# Altium PCB System Control.PcbDoc (part 3 of 7)
Units mil, origin at the board's own origin, x right, y up, seen from the top; angles counter-clockwise.
Board outline 5312.56 x 5103.22 mil, 12 copper layers (Top, GND 2, Signal 3, Signal 4, 3.3V 5, Signal 6, Signal 7, 2.5V 8, Signal 9, Signal 10, GND 11, Bottom); 503 components, 484 nets, 2219 pads, 1158 vias.
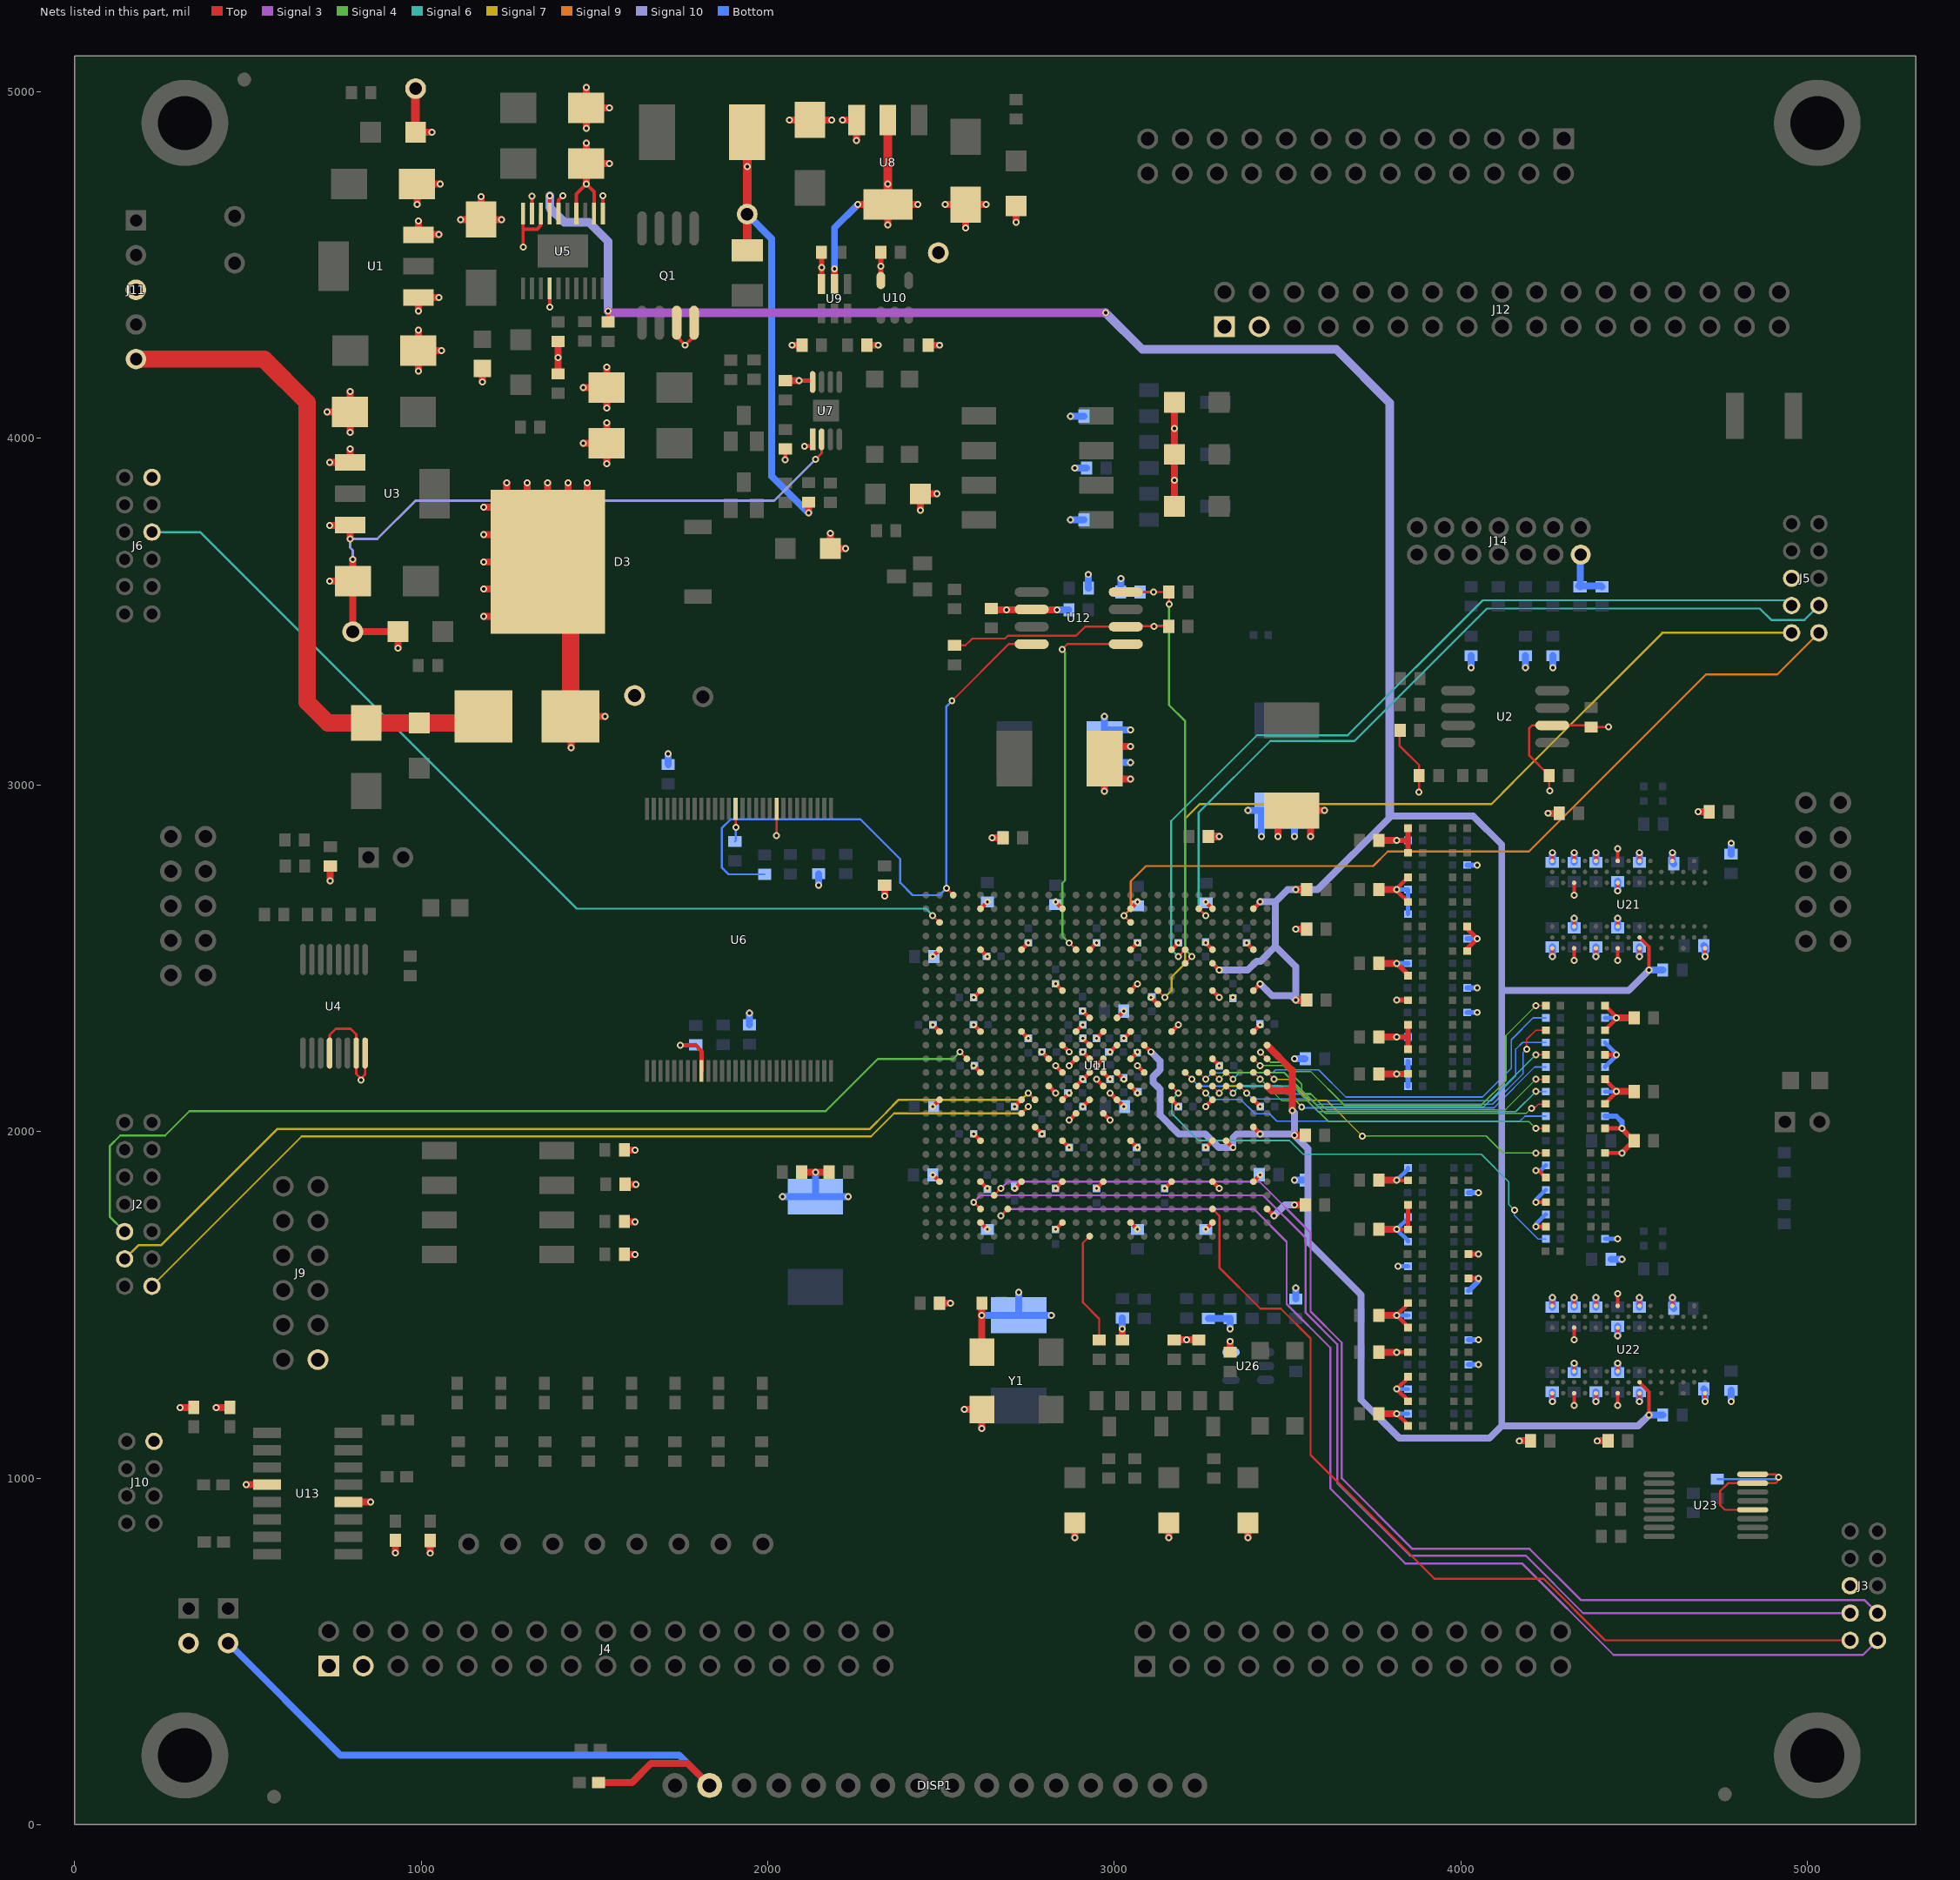
[diagram p13: the nets of this part, all layers, seen from the top]

## Part data
C1 C2 C3 C4 C8 C9 C11 C12 C22 C23 C37 C38: library part CAP_1, "SMD Tantalum Capacitors 10uF 25V 20% L ESR"
C5 C10 C16 C18 C19 C20 C21 C31 C32 C34 C42 C44 C47 C48 C51 C52 C53 C57 C64 C65 C69 C79 C100 C170 C171 C183 C205 C208 C209 C211 C213 C215 C226 C227 C231 C232 C234 C235 C236 C237 C238 C246 C248 C252: library part "CAP NP_1", "CAP CER .10UF 50V X7R 0603"
C6 C13 C14 C55 C56 C63 C80 C81 C253: library part "CAP NP_1", "CAP 1UF 25V CERAMIC 0603 X5S"
C7: library part "CAP NP_1", "CAP .1UF 50V CERM CHIP 1206 X7R"
C15 C36 C43 C45 C46 C49 C50 C59 C104 C112 C115 C163 C175 C247 C251: library part "CAP NP_1", "CAP CER 4.7UF 10V Y5V 0603"
C17: library part "CAP NP_1", "CAP .033UF 50V CERAMIC X7R 0603"
C25: library part CAP_1, "CAPACITOR TANT 100UF 25V 20% SMD"
C35 C54 C102 C105 C124 C172: library part CAP_1, "CAP TANT LOESR 470UF 10V 10% SMD"
C58 C60 C61 C62 C66 C67 C68 C76 C77 C78 C85 C86 C87 C88 C180 C182 C185 C187 C210 C212 C214 C216 C225 C228 C229 C230 C233 C240 C241 C242 C243 C244 C245: library part "C10nF 50V X7R 0603", "CAP 10000PF 50V CERM X7R 0603"
C106 C108 C110 C116 C123 C134 C146 C153 C155 C156 C168 C169 C179 C181 C186: library part "CAP NP_1", "CAP CER 1.0UF 10V X5R 10% 0402"
C107 C109 C113 C117 C118 C119 C120 C121 C122 C125 C126 C127 C129 C130 C131 C132 C133 C135 C136 C137 C138 C139 C140 C141 C142 C143 C145 C147 C148 C149 C150 C151 C152 C154 C157 C158 C159 C160 C161 C164 C165 C167 C173 C174 C178: library part "C10nF 50V X7R 0603", "CAP .01UF 25V CERAMIC X7R 0402"
D1 D2 D4 D5 D8 D9 D12 D13 D14 D15 D16: library part LED, "LED 635NM RED WTR CLR 1206 SMD"
D3: "On Semi Switchmode Power Rectifier"
D6: library part LED, "LED INGAN/SIC U-BLUE CLR 1206SMD"
DISP1: "CONN SOCKET STRIP LOPRO 16 PIN"
F1 F2 F4: library part "TEST POINT"
F3: library part "FUSE THERMAL", "FUSEBLOCK W/3A FUSE SMD FAST"
J1 J8: library part "CONNECTOR DB9_1", "CONN HEADER 10 POS STRGHT GOLD"
J2: library part "14 pin Hirose", "CONN HEADER 14POS 2MM PCB TIN"
J3 J5: library part HEADER_2X5_1, "CONN HEADER 10POS 2MM PCB TIN"
J4 J12: library part "Header 17X2", "CONN HEADER LOPRO STR .100 34POS"
J6: library part HEADER_2X6_1, "CONN HEADER 12POS 2MM PCB TIN"
J7 J13: library part "Header 13X2", "CONN HEADER LOPRO STR .100 26POS"
J9: "CONN HEADER 12POS .100\" STR TIN"
J10: "CONN HEADER 8POS 2MM PCB TIN"
J11: library part "Header 5", "CONN HEADER 5POS .100 VERT GOLD"
J14: "CONN HEADER 14POS 2MM VERT GOLD"
L1: library part INDUCTOR, "INDUCTOR POWER 2.2UH 3.25A SMD"
L2: library part "TDK Inductor", "INDUCTOR WW PWR 47UH 260MA 10%"
LD0 LD1 LD2 LD3 LD4 LD5 LD6 LD7: "LED 565NM GRN DIFF 0603 SMD"
MT1 MT2 MT3 MT4: library part CON1_0
Q1: "MOSFET N-CH DUAL 30V 3.5A 8SOIC"
Q2 Q3 Q4 Q5 Q6 Q7 Q9 Q10 Q11: library part NDS355N/SOT, "MOSFET N-CH 30V 1.6A SOT-23"
R1: library part RESISTOR_0_Dup1, "RES 100K OHM 1/10W .1% 0805 SMD"
R2 R3 R4 R14 R19 R23 R33 R38 R39 R42 R174 R175 R176: library part "R1K 5% 0603", "RES 1.0K OHM 1/10W 5% 0603 SMD"
R5: library part RESISTOR_0_Dup1, "RES 10K OHM 1/10W 5% 0603 SMD"
R6: library part RESISTOR_0_Dup1, "RES 5.11K OHM 1/10W 1% 0603 SMD"
R7: library part RESISTOR_0_Dup1, "RES 750 OHM 1/10W 5% 0603 SMD"
R9 R27 R30 R180 R182 R294: library part "R0 5% 0603", "RES ZERO OHM 1/10W 5% 0603 SMD"
R10 R129: library part R, "RES 100 OHM 1/10W 1% 0805 SMD"
R11 R12 R13 R15 R17 R21 R22 R24 R26 R29 R31 R37 R40 R41 R47 R48 R49 R50 R146 R147 R150 R152 R153 R154 R155 R156 R159 R163 R165 R183 R275: library part "R10K 5% 0603", "RES 10K OHM 1/10W 5% 0603 SMD"
R16 R158 R167 R170 R172 R177 R178: library part "R4.7K 5% 0603", "RES 4.7K OHM 1/10W 5% 0603 SMD"
R18 R28 R34 R36 R43 R44 R45 R46: "RES 270 OHM 1/10W 5% 0603 SMD"
R20: library part "R1K 5% 0603", "RES 6.80K OHM 1/10W 1% 0603 SMD"
R25: library part "R1K 5% 0603", "RES 30.9K OHM 1/10W 1% 0603 SMD"
R32 R35: library part "R10K 5% 0603", "RES 33 OHM 1/10W 5% 0603 SMD"
R51 R52 R53 R54 R56 R58 R59 R60 R61 R62 R63 R64 R66 R68 R69 R70 R71 R72 R80 R81 R90 R92 R108 R110 R111 R117 R118 R119 R120 R121 R122 R123 R168 R192 R193 R195 R196 R198 R201 R202 R203 R205 R206 R207 R208 R210 R213 R222 R225 R228 R229 R232 R236 R239 R240 R266 R267 R268 R273 R274 R276 R277 R279 R282: library part "R1K 5% 0603", "RES 60.4 OHM 1/16W 1% 0402 SMD"
R55 R57 R65 R67 R76 R77 R78 R79 R82 R83 R84 R85 R86 R87 R88 R89 R91 R93 R94 R95 R96 R97 R164 R194 R197 R199 R200 R204 R209 R211 R212 R221 R223 R224 R226 R227 R230 R231 R233 R234 R235 R237 R238 R241 R242: library part "R1K 5% 0603", "RES 24.0 OHM 1/16W 1% 0402 SMD"
R73 R74 R99 R100: "RES 1.0K OHM 1/10W 5% 0603 SMD"
R75 R98 R101 R116: "RES 120 OHM 1/10W 1% 0603 SMD"
R102 R103 R104 R105 R106 R107 R109 R112 R113 R114 R115 R260 R261 R262 R263 R264 R265 R269 R278 R280 R281 R284 R286 R289 R290: library part "R1K 5% 0603", "RES 33.0 OHM 1/16W 1% 0402 SMD"
R157 R160 R166 R171: library part "R1K 5% 0603", "RES 49.9 OHM 1/10W 1% 0603 SMD"
R285 R287: library part RESISTOR_0, "RES 100 OHM 1/16W .5% 0603 SMD"
S1 S3: "SWITCH KEY 4MM SQ SMD GULL WING"
S2 S4: "SWITCH DIP 4POS TOP SLIDE SMT"
TP1 TP2: library part "TEST POINT", "TEST POINT PC MINI .040\"D RED"
TP3 TP4 TP6 TP7 TP8 TP9 TP10 TP11 TP12 TP13 TP14 TP15 TP16: "TEST POINT PC MINI .040\"D RED"
TP5: "TEST POINT PC MINI .040\"D BLACK"
U1: library part LT1963A, "IC REG LDO LN 1.5A 3.3V SOT-223"
U2 U12: "Flash Mem Serial-SPI 2.7V to 3.6V 16M-Bit 6ns 8-Pin SOIC"
U3: library part LT1963A, "IC REG LDO LN 1.5A 2.5V SOT223-3"
U4 U23: library part MAX3221/SO_0, "IC DRVR/RCVR RS-232 1-CH 16TSSOP"
U5: "Controllers - DC/DC DDR2 SWITCHER AND LDO"
U6: "Flash Mem Parallel 2.7V to 3.6V 128M-Bit 16M x 8/8M x 16 75ns 56-Pin TSOP"
U7: "IC 3.3/2.5V/ADJ TPL MONIT 8-MSOP"
U8: "IC REG LDO 1.0A POS SOT223"
U9: "IC VOLT SUPERVISOR 1.2V SOT23-6"
U10: "IC 4.55V SUPPLY MONITOR SOT23-5"
U11: "IC, SPARTAN-3A, FPGA, 1400K, 656FBGA"
U13: "IC, OPTOCOUPLER, QUAD, BIDIR, 16-SOIC"
U21 U22: library part "MT47H32M16BN-3:D TR", "IC DDR2 SDRAM 256MB 84-FBGA"
U26: "Single 2-input AND Gate"
W1 W2 W3 W4: "CONN HEADER 2POS .100\" STR TIN"
Y1: library part FXO-HC73, "OSC 125.0000 MHZ 3.3V HCMOS SMT"

## Via types
v1: diameter 20, hole 10, Top to Bottom, tented top, 1040 vias
v2: diameter 20, hole 8, Top to Bottom, tented top, 118 vias

## Nets (pads, with @x,y where several pads share a name; then routed paths per layer and width w, separated by ;. In a path a pad name is that pad's centre, name@x,y a point inside that pad or via, vN(x,y) a via of type N, cw(c..) or ccw(c..) an arc to the next point about the centre after c; other vN are vias at no path point)
3V3_CAM: J10.1 R73.2 R74.2 U13.4 | length 140
  Top w20: v1(304,1204) R73.2@344,1204 ; v1(408,1204) R74.2@448,1204 ; v1(495,981) U13.4@555,981
+0.9V: C11.P C12.P C57.1 C58.1 C61.1 C62.1 C64.1 C65.1 C66.1 C67.1 C68.1 C69.1 C85.1 C86.1 C87.1 C229.1 R51.2 R52.2 R53.2 R54.2 R56.2 R58.2 R59.2 R60.2 R61.2 R62.2 R63.2 R64.2 R66.2 R68.2 R69.2 R70.2 R71.2 R72.2 R80.2 R81.2 R90.2 R92.2 R108.2 R110.2 R111.2 R117.2 R118.2 R119.2 R120.2 R121.2 R122.2 R123.2 R168.2 R192.2 R193.2 R195.2 R196.2 R198.2 R201.2 R202.2 R203.2 R205.2 R206.2 R207.2 R208.2 R210.2 R213.2 R222.2 R225.2 R228.2 R229.2 R232.2 R236.2 R239.2 R240.2 R266.2 R267.2 R268.2 R273.2 R274.2 R276.2 R277.2 R279.2 R282.2 U5.2 U5.4 | length 3947.3
  Top w10: U5.4@1447.39,4648.82 1447.39,4704.92 v1(1475.93,4733.46) 1498.57,4710.83 U5.2@1498.57,4648.82
  Top w12.01: v1(3814.52,1186.22) 3847.31,1153.43 R72.2@3847.32,1150.79 ; v1(3814.52,1363.39) R69.2@3847.32,1363.39 ; v1(3814.52,1717.72) R64.2@3847.32,1717.72 R63.2@3847.32,1788.58 ; v1(3814.52,1859.45) R62.2@3847.32,1859.45 ; R71.2@3847.32,1221.65 3847.31,1224.29 v1(3814.52,1257.09) 3847.31,1289.88 R70.2@3847.32,1292.52 ; R68.2@3847.32,1434.25 3847.31,1436.89 v1(3814.52,1469.68) 3847.31,1502.48 R66.2@3847.32,1505.12 ; R53.2@3847.32,2662.6 3814.52,2695.39 v1(3814.52,2698.03) 3814.52,2700.67 R54.2@3847.32,2733.46 ; v1(4216.09,1725.59) R111.2@4244.95,1725.59 ; v1(4216.09,1796.46) R110.2@4244.95,1796.46 ; v1(4216.09,1887.01) 4225.26,1887.01 R108.2@4244.95,1867.32 ; R123.2@4415.57,1938.19 v1(4464.12,1938.19) ; R122.2@4415.57,2009.06 v1(4464.12,2009.06) ; R120.2@4415.57,2079.92 4444.44,2108.78 4444.44,2111.42 v1(4448.37,2115.35) 4444.44,2119.29 4444.44,2121.93 R121.2@4415.57,2150.79 ; R119.2@4415.57,2221.65 v1(4448.37,2221.65) ; R117.2@4415.57,2292.52 4444.44,2321.38 4444.44,2324.02 v1(4448.37,2327.95) 4444.44,2331.89 4444.44,2334.53 R118.2@4415.57,2363.39
  Top w15: v1(3814.52,2166.54) R60.2@3847.32,2166.53 ; v1(3814.52,2272.83) 3847.31,2272.83 ; v1(3814.52,2379.13) R56.2@3847.32,2379.13 ; v1(3814.52,2485.43) 3847.31,2452.64 R58.2@3847.32,2450 ; v1(3814.52,2839.76) 3847.31,2839.76 ; R61.2@3847.32,2237.4 3847.31,2272.83 ; R59.2@3847.32,2308.27 3847.31,2272.83 ; R52.2@3847.32,2804.33 3847.31,2839.76 ; R51.2@3847.32,2875.2 3847.31,2839.76 ; R81.2@4017.93,2520.87 4017.94,2527.44 v1(4046.8,2556.3) 4017.94,2585.16 R80.2@4017.93,2591.73 ; R92.2@4021.87,1575.98 v1(4050.74,1575.98) ; R90.2@4021.87,1646.85 v1(4050.74,1646.85) ; v1(4464.12,1938.19) C87.1@4499.56,1973.62 v1(4464.12,2009.06)
  Top w20: v1(1475.93,4733.46) C12.P@1475.93,4792.52 ; v1(1475.93,4851.57) C12.P@1475.93,4792.52 ; v1(1475.93,4894.88) C11.P@1475.93,4953.94 ; v1(1475.93,5012.99) C11.P@1475.93,4953.94 ; v1(1542.86,4792.52) C12.P@1475.93,4792.52 ; v1(1542.86,4953.94) C11.P@1475.93,4953.94 ; C69.1@3763.34,1186.22 v1(3814.52,1186.22) ; C68.1@3763.34,1363.39 v1(3814.52,1363.39) ; C67.1@3763.34,1469.68 v1(3814.52,1469.68) ; C66.1@3763.34,1717.72 v1(3814.52,1717.72) ; C65.1@3763.34,1859.45 v1(3814.52,1859.45) ; C64.1@3763.34,2166.53 v1(3814.52,2166.54) ; C62.1@3763.34,2272.83 v1(3814.52,2272.83) ; C61.1@3763.34,2485.43 v1(3814.52,2485.43) ; C58.1@3763.34,2698.03 v1(3814.52,2698.03) ; C57.1@3763.34,2839.76 v1(3814.52,2839.76) ; v1(4448.37,2115.35) C86.1@4499.56,2115.35 ; v1(4448.37,2327.95) C85.1@4499.56,2327.95
  Bottom w12.01: v1(3814.52,1186.22) R213.2@3847.32,1186.22 ; v1(3814.52,1257.09) R210.2@3847.32,1257.09 ; v1(3814.52,1469.68) R208.2@3847.32,1469.68 ; v1(3814.52,1859.45) 3847.31,1892.24 R203.2@3847.32,1894.88 ; v1(3814.52,2698.03) R193.2@3847.32,2698.03 R195.2@3847.32,2627.17 ; v1(3818.45,1611.42) R207.2@3847.32,1611.42 ; R205.2@3847.32,1682.28 3847.31,1684.92 v1(3814.52,1717.72) 3847.31,1750.51 R206.2@3847.32,1753.15 ; v1(4216.09,1725.59) 4216.09,1732.17 R268.2@4244.95,1761.02 ; v1(4216.09,1796.46) 4216.09,1803.03 R267.2@4244.95,1831.89 ; v1(4216.09,1887.01) 4229.2,1887.01 R266.2@4244.95,1902.76 ; R282.2@4415.57,1690.16 v1(4452.31,1690.16) ; R277.2@4415.57,2115.35 v1(4448.37,2115.35) ; R276.2@4415.57,2186.22 4444.44,2215.08 4444.44,2217.72 v1(4448.37,2221.65) 4444.44,2225.59 4444.44,2228.23 R274.2@4415.57,2257.09 ; R273.2@4415.57,2327.95 v1(4448.37,2327.95)
  Bottom w15: v1(3814.52,2166.54) 3846.01,2166.54 ; v1(3814.52,2272.83) R198.2@3847.32,2272.83 ; v1(3814.52,2485.43) R196.2@3847.32,2485.43 ; v1(3814.52,2839.76) R192.2@3847.32,2839.76 ; R202.2@3847.32,2131.1 R201.2@3847.32,2201.97 ; R229.2@4017.93,2343.7 v1(4046.8,2343.7) ; R228.2@4017.93,2414.57 v1(4046.8,2414.57) ; R225.2@4017.93,2556.3 v1(4046.8,2556.3) ; R222.2@4017.93,2768.9 v1(4046.8,2768.9) ; R239.2@4021.87,1327.95 v1(4050.74,1327.95) ; R240.2@4021.87,1398.82 v1(4050.74,1398.82) ; R236.2@4021.87,1540.55 4050.74,1569.41 v1(4050.74,1575.98) ; R232.2@4021.87,1824.02 v1(4050.74,1824.02) ; R279.2@4415.57,2044.49 4448.37,2044.49 4464.12,2028.74 v1(4464.12,2009.06)
  Bottom w20: C229.1@4432.63,1631.1 v1(4464.12,1631.1)
  other v2: 3342.08,2387.01
+1.2V: C38.P C50.1 C131.1 C136.1 C137.1 C138.1 C139.1 C140.1 C141.1 C142.1 C146.1 C147.1 C149.1 C150.1 C151.1 C152.1 C153.1 C163.1 C172.P D8.1 TP7.1 U8.2 U8.4 U9.5 U11.K15 U11.L12 U11.L14 U11.L16 U11.M11 U11.M13 U11.M15 U11.M17 U11.N12 U11.N13 U11.N14 U11.N16 U11.P11 U11.P13 U11.P14 U11.P15 U11.R12 U11.R14 U11.R16 U11.T11 U11.T13 U11.T15 U11.U12 | length 2931.2
  Top w12: U11.M17@2810.58,2131.1 v1(2830.27,2111.42) ; v1(2830.26,2190.16) U11.N16@2849.95,2170.47 ; U11.L16@2849.95,2091.73 v2(2869.64,2111.42) ; U11.R16@2849.95,2249.21 v1(2869.64,2229.53) ; v1(2869.63,2032.67) U11.K15@2889.32,2052.36 ; v1(2869.63,2190.16) U11.P15@2889.32,2209.84 ; U11.M15@2889.32,2131.1 v2(2909.01,2150.79) U11.N14@2928.69,2170.47 ; U11.T15@2889.32,2288.58 v2(2909.01,2308.27) ; v2(2909,2072.04) U11.L14@2928.69,2091.73 ; v2(2909,2229.53) U11.P14@2928.69,2209.84 ; v2(2909,2268.9) U11.R14@2928.69,2249.21 ; v1(2948.37,2150.79) U11.M13@2968.06,2131.1 ; v1(2948.37,2190.16) U11.P13@2968.06,2209.84 ; v2(2948.37,2268.9) U11.T13@2968.06,2288.58 ; U11.N13@2968.06,2170.47 v2(2987.75,2150.79) ; v1(2987.74,2111.42) U11.L12@3007.43,2091.73 v2(3027.12,2072.04) ; v2(2987.74,2229.53) U11.R12@3007.43,2249.21 ; U11.N12@3007.43,2170.47 v2(3027.12,2150.79) ; U11.U12@3007.43,2327.95 v2(3027.12,2347.64) ; v2(3027.11,2268.9) U11.T11@3046.8,2288.58 ; U11.M11@3046.8,2131.1 v2(3066.49,2111.42) ; U11.P11@3046.8,2209.84 v2(3066.49,2229.53)
  Top w20: U9.5@2192.47,4445.08 v1(2192.47,4489.37) ; v1(2259.4,4674.41) U8.4@2346.01,4674.41 ; v1(2346.01,4615.35) U8.4@2346.01,4674.41 ; U8.2@2346.01,4917.95 U8.2@2346.56,4918.5 ; v1(2511.37,4674.41) C38.P@2570.42,4674.41 ; v1(2570.42,4607.48) C38.P@2570.42,4674.41 ; v1(2629.48,4674.41) C38.P@2570.42,4674.41 ; v1(2716.09,4623.23) D8.1@2716.09,4670.47 ; C50.1@3271.21,2851.57 v1(3302.71,2851.57) ; U8.4@2346.01,4674.41 U8.4@2346.56,4674.41 ; U8.4@2346.01,4674.41 U8.4@2346.56,4674.41 ; U8.4@2346.01,4674.41 U8.4@2346.56,4674.41 ; U8.4@2346.01,4674.41 U8.4@2346.56,4674.41 ; U8.4@2346.01,4674.41 U8.4@2346.56,4674.41 ; U8.4@2346.01,4674.41 U8.4@2346.09,4674.49 ; U8.4@2346.01,4675.04 U8.4@2346.56,4674.5 ; U8.4@2346.01,4675.04 U8.4@2346.56,4674.5 ; U8.4@2346.01,4675.04 U8.4@2346.56,4674.5 ; U8.4@2346.01,4675.04 U8.4@2346.56,4674.5 ; U8.4@2346.01,4675.04 U8.4@2346.56,4674.5 ; U8.4@2346.09,4674.49 U8.4@2346.56,4674.5 ; U8.4@2346.09,4674.49 U8.4@2346.56,4674.5 ; U8.4@2346.09,4674.49 U8.4@2346.56,4674.5 ; U8.4@2346.09,4674.49 U8.4@2346.56,4674.5 ; U8.4@2346.09,4674.49 U8.4@2346.56,4674.5 ; U8.4@2346.56,4674.41 v1(2432.63,4674.41) ; U8.4@2346.56,4674.41 v1(2432.63,4674.41) ; U8.4@2346.56,4674.41 v1(2432.63,4674.41) ; U8.4@2346.56,4674.41 v1(2432.63,4674.41) ; U8.4@2346.56,4674.41 v1(2432.63,4674.41)
  Top w25: U8.4@2346.01,4675.04 v1(2346.01,4733.46) U8.2@2346.01,4917.95
  Bottom w20: v1(2192.47,4489.37) 2192.47,4607.48 v1(2259.4,4674.41) ; C163.1@3271.21,2851.57 v1(3302.71,2851.57) ; v1(3385.38,2926.38) C172.P@3424.75,2926.38 ; v1(3424.75,2851.57) C172.P@3424.75,2926.38 ; v1(3424.75,2851.57) C172.P@3424.75,2926.38 ; v1(3424.75,2851.57) C172.P@3424.75,2926.38 ; v1(3424.75,2851.57) C172.P@3424.75,2926.38 ; v1(3424.75,2851.57) C172.P@3424.75,2926.38 ; C172.P@3424.75,2926.38 C172.P@3483.81,2926.38 C172.P@3519.24,2926.38 ; v1(3519.24,2851.57) C172.P@3519.24,2926.38 ; v1(3519.24,2851.57) C172.P@3519.24,2926.38 ; v1(3519.24,2851.57) C172.P@3519.24,2926.38 ; v1(3519.24,2851.57) C172.P@3519.24,2926.38 ; v1(3519.24,2851.57) C172.P@3519.24,2926.38
+1.8V: C9.P C25.P C54.P C59.1 C76.1 C77.1 C78.1 C88.1 C164.1 C165.1 C167.1 C173.1 C174.1 C175.1 C178.1 C179.1 C181.1 C186.1 C205.1 C208.1 C209.1 C210.1 C211.1 C212.1 C213.1 C214.1 C215.1 C216.1 C225.1 C226.1 C227.1 C228.1 C230.1 C231.1 C232.1 C233.1 C234.1 C235.1 C236.1 C237.1 C238.1 C240.1 C241.1 C243.1 C244.1 C246.1 C247.1 C251.1 L1.2 R20.1 TP6.1 U5.1 U5.6 U5.9 U11.AB2 U11.E2 U11.H5 U11.L2 U11.L8 U11.P5 U11.T2 U11.T8 U11.W5 U21.A1 U21.A9 U21.C1 U21.C3 U21.C7 U21.C9 U21.E1 U21.E9 U21.G1 U21.G3 U21.G7 U21.G9 U21.J1 U21.J9 U21.M9 U21.R1 U22.A1 U22.A9 U22.C1 U22.C3 U22.C7 U22.C9 U22.E1 U22.E9 U22.G1 U22.G3 U22.G7 U22.G9 U22.J1 U22.J9 U22.M9 U22.R1 | length 4761.2
  Top w10: U5.9@1319.44,4648.82 v1(1319.44,4699.02) ; U5.6@1396.21,4648.82 1396.21,4687.2 v1(1409,4700) ; U5.1@1524.16,4648.82 v1(1524.16,4700) ; v1(4263.34,1221.65) U22.A1@4263.34,1245.28 ; U22.A9@4263.34,1497.24 v1(4263.34,1520.87) ; v1(4263.34,2505.12) U21.A1@4263.34,2528.74 ; U21.A9@4263.34,2780.71 v1(4263.34,2804.33) ; v1(4326.33,1209.84) U22.C1@4326.33,1245.28 ; U22.C3@4326.33,1308.27 v1(4326.33,1331.89) ; v1(4326.33,1398.82) U22.C7@4326.33,1434.25 ; U22.C9@4326.33,1497.24 v1(4326.33,1520.87) ; v1(4326.33,2493.31) U21.C1@4326.33,2528.74 ; U21.C3@4326.33,2591.73 v1(4326.33,2615.35) ; v1(4326.33,2682.28) U21.C7@4326.33,2717.72 ; U21.C9@4326.33,2780.71 v1(4326.33,2804.33) ; v1(4389.32,1221.65) U22.E1@4389.32,1245.28 ; U22.E9@4389.32,1497.24 v1(4389.32,1520.87) ; v1(4389.32,2505.12) U21.E1@4389.32,2528.74 ; U21.E9@4389.32,2780.71 v1(4389.32,2804.33) ; v1(4452.31,1209.84) U22.G1@4452.31,1245.28 ; U22.G3@4452.31,1308.27 v1(4452.31,1331.89) ; v1(4452.31,1410.63) U22.G7@4452.31,1434.25 ; U22.G9@4452.31,1497.24 v1(4452.31,1532.68) ; v1(4452.31,2493.31) U21.G1@4452.31,2528.74 ; U21.G3@4452.31,2591.73 v1(4452.31,2615.35) ; v1(4452.31,2694.09) U21.G7@4452.31,2717.72 ; U21.G9@4452.31,2780.71 v1(4452.31,2816.14) ; v1(4515.3,1221.65) U22.J1@4515.3,1245.28 ; U22.J9@4515.3,1497.24 v1(4515.3,1520.87) ; v1(4515.3,2505.12) U21.J1@4515.3,2528.74 ; U21.J9@4515.3,2780.71 v1(4515.3,2804.33) ; U22.M9@4609.79,1497.24 v1(4609.79,1520.87) ; U21.M9@4609.79,2780.71 v1(4609.79,2804.33) ; v1(4704.28,1221.65) U22.R1@4704.28,1245.28 ; v1(4704.28,2505.12) U21.R1@4704.28,2528.74
  Top w12: U11.L8@3164.91,2091.73 v2(3184.6,2072.04) ; U11.T8@3164.91,2288.58 v1(3184.6,2308.27) ; v2(3263.33,1953.93) U11.H5@3283.02,1973.62 ; U11.P5@3283.02,2209.84 v2(3302.71,2190.16) ; U11.W5@3283.02,2406.69 v1(3302.71,2387.01) ; v2(3381.44,2544.49) U11.AB2@3401.13,2524.8 ; U11.E2@3401.13,1855.51 v2(3420.82,1875.2) ; U11.L2@3401.13,2091.73 v2(3420.82,2072.04) ; U11.T2@3401.13,2288.58 v2(3420.82,2308.27)
  Top w20: v1(1113.73,4631.1) C9.P@1172.78,4631.1 ; v1(1172.78,4698.03) C9.P@1172.78,4631.1 ; v1(1231.84,4631.1) C9.P@1172.78,4631.1 ; v1(2117.67,3784.65) R20.1@2117.67,3816.14 ; v1(3523.18,2583.86) C59.1@3554.67,2583.86 ; v1(3605.85,2926.38) C54.P@3566.48,2926.38 ; v1(4168.85,1107.48) C76.1@4200.34,1107.48 ; v1(4251.52,2918.5) C77.1@4283.02,2918.5 ; v1(4393.26,1107.48) C78.1@4424.75,1107.48 ; v1(4684.59,2922.44) C88.1@4716.09,2922.44 ; v1(3472,2851.57) C54.P@3472,2926.38 ; v1(3472,2851.57) C54.P@3472,2926.38 ; v1(3472,2851.57) C54.P@3472,2926.38 ; v1(3472,2851.57) C54.P@3472,2926.38 ; v1(3472,2851.57) C54.P@3472,2926.38 ; C54.P@3472,2926.38 C54.P@3511.37,2926.38 C54.P@3566.48,2926.38 ; v1(3566.48,2851.57) C54.P@3566.48,2926.38 ; v1(3566.48,2851.57) C54.P@3566.48,2926.38 ; v1(3566.48,2851.57) C54.P@3566.48,2926.38 ; v1(3566.48,2851.57) C54.P@3566.48,2926.38 ; v1(3566.48,2851.57) C54.P@3566.48,2926.38
  Top w25: L1.2@1940.5,4542.56 TP6.1@1940.5,4646.85 v1(1940.5,4784.65) C25.P@1940.5,4883.07
  Bottom w11.97: C179.1@3550.34,2209.74 C179.1@3550.8,2210.19
  Bottom w20: TP6.1@1940.5,4646.85 2011.37,4575.98 2011.37,3890.94 v1(2117.67,3784.65) ; v1(3519.24,1859.45) C181.1@3550.74,1859.45 ; v1(3520.2,2209.74) C179.1@3550.34,2209.74 ; v1(3523.18,2583.86) C186.1@3554.67,2583.86 ; v1(4168.85,1107.48) C205.1@4200.34,1107.48 ; v1(4251.52,2918.5) C208.1@4283.02,2918.5 ; v1(4263.34,1221.65) C215.1@4263.34,1249.21 ; C213.1@4263.34,1493.31 v1(4263.34,1520.87) ; v1(4263.34,2505.12) C211.1@4263.34,2532.68 ; C209.1@4263.34,2776.77 v1(4263.34,2804.33) ; C216.1@4326.33,1304.33 v1(4326.33,1331.89) ; C214.1@4326.33,1493.31 v1(4326.33,1520.87) ; C212.1@4326.33,2587.8 v1(4326.33,2615.35) ; C210.1@4326.33,2776.77 v1(4326.33,2804.33) ; v1(4389.32,1221.65) C232.1@4389.32,1249.21 ; C231.1@4389.32,1493.31 v1(4389.32,1520.87) ; v1(4389.32,2505.12) C227.1@4389.32,2532.68 ; C226.1@4389.32,2776.77 v1(4389.32,2804.33) ; v1(4393.26,1107.48) C234.1@4424.75,1107.48 ; C233.1@4452.31,1304.33 v1(4452.31,1331.89) ; v1(4452.31,1410.63) C230.1@4452.31,1438.19 ; C228.1@4452.31,2587.8 v1(4452.31,2615.35) ; v1(4452.31,2694.09) C225.1@4452.31,2721.65 ; v1(4515.3,1221.65) C238.1@4515.3,1249.21 ; C237.1@4515.3,1493.31 v1(4515.3,1520.87) ; v1(4515.3,2505.12) C236.1@4515.3,2532.68 ; C235.1@4515.3,2776.77 v1(4515.3,2804.33) ; v1(4609.79,1520.87) 4609.79,1493.31 C243.1@4613.73,1489.37 ; v1(4609.79,2804.33) 4609.79,2776.77 C240.1@4613.73,2772.83 ; v1(4684.59,2922.44) C246.1@4716.09,2922.44 ; C244.1@4700.34,1257.09 4704.28,1253.15 v1(4704.28,1221.65) ; C241.1@4700.34,2536.61 4704.28,2532.68 v1(4704.28,2505.12) ; v1(4779.08,1221.65) C251.1@4779.08,1253.15 ; C247.1@4779.08,2800.39 v1(4779.08,2831.89)
+2.5V: C4.P D2.1 TP8.1 U3.3 U7.2 | length 2353.7
  Top w7: v1(2137.54,3939.38) 2155.07,3956.91 U7.2@2155.07,3997.24
  Top w20: v1(735.78,3587.8) C4.P@802.71,3587.8 ; v1(794.83,3709.84) U3.3@794.83,3749.21 ; U3.3@794.83,3750.32 U3.3@794.83,3749.21 ; v1(802.71,3650.79) C4.P@802.71,3587.8 ; v1(932.63,3394.88) D2.1@932.63,3442.13 TP8.1@802.71,3442.13 C4.P@802.71,3587.8 ; v1(735.78,3749.21) U3.3@794.83,3749.21 ; v1(735.78,3749.21) U3.3@794.83,3749.21 ; v1(735.78,3749.21) U3.3@794.83,3749.21 ; v1(735.78,3749.21) U3.3@794.83,3749.21 ; v1(735.78,3749.21) U3.3@794.83,3749.21
  Signal 10 w7: v1(802.71,3650.79) 802.71,3677.29 794.83,3685.17 v1(794.83,3709.84) 873.18,3709.84 983.89,3820.56 2018.71,3820.56 v1(2137.54,3939.38)
+3.3V: C1.P C18.1 C32.1 C35.P C36.1 C37.P C43.1 C45.1 C46.1 C47.1 C48.1 C49.1 C53.1 C100.1 C102.P C104.1 C105.P C106.1 C107.1 C108.1 C109.1 C110.1 C112.1 C113.1 C115.1 C116.1 C117.1 C118.1 C119.1 C120.1 C121.1 C122.1 C123.1 C124.P C125.1 C126.1 C127.1 C129.1 C130.1 C132.1 C133.1 C134.1 C135.1 C143.1 C145.1 C148.1 C154.1 C155.1 C156.1 C157.1 C158.1 C159.1 C160.1 C161.1 C168.1 C169.1 C170.1 C171.1 D1.1 D9.1 D12.1 D13.1 D14.1 D15.1 D16.1 J3.5 J4.1 J4.3 J5.5 J6.1 J9.1 J11.3 J12.1 J12.3 J14.2 R11.2 R12.2 R13.2 R14.2 R16.1 R21.2 R37.1 R40.1 R41.1 R47.2 R48.2 R49.2 R50.2 R99.2 R100.2 R146.2 R150.2 R152.2 R153.2 R154.2 R155.2 R156.2 R158.2 R159.1 R167.2 R172.2 R177.2 R178.2 R183.1 TP3.1 U1.3 U2.6 U6.9 U6.37 U6.43 U7.1 U8.3 U11.AB5 U11.AB8 U11.AB11 U11.AB14 U11.AB19 U11.AB22 U11.AB25 U11.AE5 U11.AE11 U11.AE16 U11.AE22 U11.B5 U11.B11 U11.B16 U11.B22 U11.E5 U11.E8 U11.E13 U11.E16 U11.E19 U11.E22 U11.E25 U11.H11 U11.H16 U11.H22 U11.J18 U11.K13 U11.L5 U11.L19 U11.L25 U11.N10 U11.N22 U11.P17 U11.T19 U11.T22 U11.T25 U11.U14 U11.V9 U11.W11 U11.W16 U11.W22 U12.6 U13.12 U26.5 W3.2 Y1.1 Y1.4 | length 8724.8
  Top w5.91: v1@1907.16,2878 U6.43@1907.16,2930.95 ; v1(2025,2854) 2025.27,2854.27 U6.37@2025.27,2930.95
  Top w6.02: R12.2@3824.4,3157.23 3823.04,3155.87 3823.04,3112.82 3879.4,3056.46 R11.2@3879.4,3027.23 3879.4,2980.21 v1(3878.15,2978.96) ; v1(4256.11,2982.9) 4254.4,2984.61 R13.2@4254.4,3027.23 4197.05,3084.58 4197.05,3164 4204.99,3171.94 U2.6@4263.37,3171.94 4370.69,3171.94 C18.1@4375.4,3167.23 4424.69,3167.23 v1(4425.4,3167.94)
  Top w11.97: v1(1747,2249) 1792,2249 1808.73,2232.27 U6.9@1808.73,2175.05 ; v1(2050.3,3938.03) 2050.74,3938.46 R16.1@2050.74,3969.68
  Top w12: v2(2475.93,1875.2) U11.E25@2495.62,1855.51 ; v2(2475.93,2072.04) U11.L25@2495.62,2091.73 ; v2(2475.93,2308.27) U11.T25@2495.62,2288.58 ; v2(2475.93,2505.12) U11.AB25@2495.62,2524.8 ; v2(2594.04,1993.31) U11.H22@2613.73,1973.62 ; v2(2594.04,2190.16) U11.N22@2613.73,2170.47 ; v2(2594.04,2308.27) U11.T22@2613.73,2288.58 ; v2(2594.04,2387.01) U11.W22@2613.73,2406.69 ; U11.B22@2613.73,1737.4 v2(2633.41,1717.71) ; U11.E22@2613.73,1855.51 v2(2633.41,1835.82) ; U11.AB22@2613.73,2524.8 v2(2633.41,2505.12) ; U11.AE22@2613.73,2642.91 v2(2633.41,2662.6) ; v2(2712.15,1835.82) U11.E19@2731.84,1855.51 ; v2(2712.15,2072.04) U11.L19@2731.84,2091.73 ; U11.T19@2731.84,2288.58 v2(2751.53,2268.9) ; U11.AB19@2731.84,2524.8 v2(2751.53,2544.49) ; U11.J18@2771.21,2012.99 v2(2790.9,1993.3) ; v2(2790.89,2229.53) U11.P17@2810.58,2209.84 ; v2(2830.26,1717.71) U11.B16@2849.95,1737.4 ; v2(2830.26,1835.82) U11.E16@2849.95,1855.51 ; v2(2830.26,2426.38) U11.W16@2849.95,2406.69 ; v2(2830.26,2662.6) U11.AE16@2849.95,2642.91 ; U11.H16@2849.95,1973.62 v2(2869.64,1953.93) ; v2(2909,2347.64) U11.U14@2928.69,2327.95 ; U11.AB14@2928.69,2524.8 v2(2948.38,2544.49) ; v2(2948.37,1835.82) U11.E13@2968.06,1855.51 ; U11.K13@2968.06,2052.36 v1(2987.75,2032.67) ; U11.B11@3046.8,1737.4 v2(3066.49,1717.71) ; U11.H11@3046.8,1973.62 v2(3066.49,1953.93) ; U11.W11@3046.8,2406.69 v1(3066.49,2426.38) ; U11.AB11@3046.8,2524.8 v2(3066.49,2544.49) ; U11.AE11@3046.8,2642.91 v2(3066.49,2662.6) ; v1(3066.48,2190.16) U11.N10@3086.17,2170.47 ; v2(3105.85,2387.01) U11.V9@3125.54,2367.32 ; v2(3145.22,1835.82) U11.E8@3164.91,1855.51 ; U11.AB8@3164.91,2524.8 v2(3184.6,2544.49) ; v2(3263.33,1717.71) U11.B5@3283.02,1737.4 ; v1(3263.33,2072.04) U11.L5@3283.02,2091.73 ; v2(3263.33,2544.49) U11.AB5@3283.02,2524.8 ; v2(3263.33,2662.6) U11.AE5@3283.02,2642.91 ; U11.E5@3283.02,1855.51 v1(3302.71,1835.82)
  Top w12.01: U7.1@2129.48,3997.24 U7.1@2129.48,3977.56 ; v1(2105.85,3977.56) U7.1@2129.48,3977.56 ; v1(2105.85,3977.56) U7.1@2129.48,3977.56 ; v1(2105.85,3977.56) U7.1@2129.48,3977.56 ; v1(2105.85,3977.56) U7.1@2129.48,3977.56 ; v1(2105.85,3977.56) U7.1@2129.48,3977.56
  Top w15: U8.3@2255.46,4918.5 U8.3@2255.46,4919.61 ; U8.3@2255.46,4918.5 U8.3@2255.46,4919.61 ; U8.3@2255.46,4918.5 U8.3@2255.46,4919.61 ; U8.3@2255.46,4918.5 U8.3@2255.46,4919.61 ; U8.3@2255.46,4918.5 U8.3@2255.46,4919.61 ; U8.3@2255.46,4918.5 U8.3@2256.56,4918.5 U8.3@2255.46,4919.61
  Top w20: U13.12@790,931 854,931 v1(854.31,931.3) ; R100.2@925.7,820.31 925.7,784.3 v1(926,784) ; D1.1@983.81,4883.07 v1(1031.05,4883.07) ; v1(987.74,4674.41) C1.P@987.74,4733.46 v1(1054.67,4733.46) ; v1(991.68,4627.17) U1.3@991.68,4586.69 992.78,4587.8 v1(1050.74,4587.8) ; R99.2@1026,820 1026,784 v1(1026.3,783.69) ; R50.2@1586,1646 1586.08,1646 1587.08,1645 v1(1617.08,1645) ; R49.2@1586,1741 1586.08,1741 1587.08,1740 v1(1617.08,1740) ; R47.2@1586,1947 1586.08,1947 1587.08,1946 v1(1617.08,1946) ; R48.2@1588,1848 1588.08,1848 1589.08,1847 v1(1619.08,1847) ; v1(2062.55,4918.5) C37.P@2121.6,4918.5 v1(2184.59,4918.5) ; C36.1@2097.98,1883.07 v1(2137.35,1883.07) C43.1@2176.72,1883.07 ; v1(2216.09,4918.5) U8.3@2255.46,4918.5 ; v1(2336.93,2679.19) C45.1@2336.93,2710.69 ; C46.1@2495.62,1505.12 v1(2527.11,1505.12) ; v1(2566.48,1198.03) Y1.1@2617.67,1198.03 v1(2617.67,1142.91) ; Y1.4@2617.67,1363.39 v1(2617.67,1469.68) C47.1@2617.67,1505.12 ; C48.1@2645.22,3509.06 2649.16,3505.12 v1(2688.53,3505.12) 2759.99,3505.12 U12.6@2761.37,3506.5 U12.6@2761.37,3505.12 ; v1(2647.48,2847.64) C49.1@2678.98,2847.64 ; v1(2885.38,827.95) D9.1@2885.38,871.26 ; v1(2971.41,2981.61) C35.P@2971.41,3017.04 ; R37.1@3023.18,1398.82 v1(3023.18,1430.31) ; v1(3157.04,827.95) D12.1@3157.04,871.26 ; R41.1@3172.78,1398.82 v1(3208.22,1398.82) R40.1@3243.65,1398.82 ; D15.1@3172.78,3804.33 v1(3172.78,3879.13) D14.1@3172.78,3953.94 v1(3172.78,4028.74) D13.1@3172.78,4103.54 ; C53.1@3334.2,1363.39 v1(3334.2,1394.88) ; v1(3385.38,827.95) D16.1@3385.38,871.26 ; v1(2255.46,4859.45) U8.3@2255.46,4918.5 ; v1(2255.46,4859.45) U8.3@2255.46,4918.5 ; v1(2255.46,4859.45) U8.3@2255.46,4918.5 ; v1(2255.46,4859.45) U8.3@2255.46,4918.5 ; v1(2255.46,4859.45) U8.3@2255.46,4918.5 ; U12.6@2761.37,3505.12 v1(2834.2,3505.12) ; U12.6@2761.37,3505.12 v1(2834.2,3505.12) ; U12.6@2761.37,3505.12 v1(2834.2,3505.12) ; U12.6@2761.37,3505.12 v1(2834.2,3505.12) ; U12.6@2761.37,3505.12 v1(2834.2,3505.12) ; C35.P@2971.41,3017.04 v1(3046.21,3017.04) ; C35.P@2971.41,3017.04 v1(3046.21,3017.04) ; C35.P@2971.41,3017.04 v1(3046.21,3017.04) ; C35.P@2971.41,3017.04 v1(3046.21,3017.04) ; C35.P@2971.41,3017.04 v1(3046.21,3017.04) ; C35.P@2971.41,3017.04 C35.P@2971.41,3076.1 C35.P@2971.41,3111.53 ; C35.P@2971.41,3111.53 v1(3046.21,3111.53) ; C35.P@2971.41,3111.53 v1(3046.21,3111.53) ; C35.P@2971.41,3111.53 v1(3046.21,3111.53) ; C35.P@2971.41,3111.53 v1(3046.21,3111.53) ; C35.P@2971.41,3111.53 v1(3046.21,3111.53)
  Top w25: D1.1@983.81,4883.07 TP3.1@983.81,5009.06
  Bottom w5.91: C32.1@1905,2837 1908,2840 v1(1908,2878)
  Bottom w11.97: v1(1747,2249) 1791,2249 C100.1@1792,2250
  Bottom w20: v1(1712,3090.08) 1712,3060.08 1713,3059.08 R14.2@1713,3059 ; R146.2@1947,2308 v1(1947,2341.63) ; v1(2042.86,1812.2) C102.P@2137.35,1812.21 ; v1(2137.35,1883.07) C102.P@2137.35,1812.21 ; v1(2147,2710.37) R21.2@2147,2744 ; v1(2231.84,1812.2) C102.P@2137.35,1812.21 ; v1(2336.93,2679.19) C104.1@2336.93,2710.69 ; C112.1@2495.62,1505.12 v1(2527.11,1505.12) ; v1(2617.67,1469.68) C124.P@2723.97,1469.68 ; v1(2647.48,2847.64) C115.1@2678.98,2847.64 ; v1(2723.97,1536.61) C124.P@2723.97,1469.68 ; v1(2818.45,1469.68) C124.P@2723.97,1469.68 ; v1(2834.2,3505.12) R150.2@2868.75,3505.12 ; v1(2873.57,3764.96) R155.2@2912.06,3764.96 ; v1(2873.57,4064.17) R152.2@2912.06,4064.17 ; v1(2885.38,3914.57) R153.2@2919.93,3914.57 ; R154.2@2925.63,3568.11 R154.2@2924.75,3568.11 ; v1(2971.41,3198.14) C105.P@2971.41,3158.77 ; R156.2@3018.36,3556.3 3019.24,3557.17 v1(3019.24,3595.67) ; v1(3023.18,1430.31) R159.1@3023.18,1461.81 ; v1(3334.2,1394.88) 3334.2,1365.75 U26.5@3336.56,1363.39 ; v1(3334.2,1430.31) R178.2@3334.2,1460.93 ; R183.1@3523.18,1516.93 v1(3523.18,1548.43) ; v1(4028.91,3338.52) R158.2@4028.91,3373.07 ; v1(4186.39,3338.52) R167.2@4186.39,3373.07 ; v1(4265.13,3338.52) R172.2@4265.13,3373.07 ; C170.1@4343.63,3572.02 C170.1@4343.63,3573.83 ; J14.2@4345.48,3664.46 4343.63,3662.61 C170.1@4343.63,3573.83 ; C171.1@4406.62,3572.02 C171.1@4404.81,3573.83 ; R154.2@2924.75,3568.11 v1(2924.75,3607.48) ; R154.2@2924.75,3568.11 v1(2924.75,3607.48) ; R154.2@2924.75,3568.11 v1(2924.75,3607.48) ; R154.2@2924.75,3568.11 v1(2924.75,3607.48) ; R154.2@2924.75,3568.11 v1(2924.75,3607.48) ; C105.P@2971.41,3064.29 v1(3046.21,3064.29) ; C105.P@2971.41,3064.29 v1(3046.21,3064.29) ; C105.P@2971.41,3064.29 v1(3046.21,3064.29) ; C105.P@2971.41,3064.29 v1(3046.21,3064.29) ; C105.P@2971.41,3064.29 v1(3046.21,3064.29) ; C105.P@2971.41,3064.29 C105.P@2971.41,3103.66 C105.P@2971.41,3158.77 ; C105.P@2971.41,3158.77 v1(3046.21,3158.77) ; C105.P@2971.41,3158.77 v1(3046.21,3158.77) ; C105.P@2971.41,3158.77 v1(3046.21,3158.77) ; C105.P@2971.41,3158.77 v1(3046.21,3158.77) ; C105.P@2971.41,3158.77 v1(3046.21,3158.77) ; R177.2@3271.21,1460.94 R178.2@3334.2,1460.94 ; R177.2@3271.21,1460.94 R178.2@3334.2,1460.94 ; R177.2@3271.21,1460.94 R178.2@3334.2,1460.94 ; R177.2@3271.21,1460.94 R178.2@3334.2,1460.94 ; R177.2@3271.21,1460.94 R178.2@3334.2,1460.94 ; C170.1@4339.26,3573.83 C170.1@4343.63,3573.83 ; C170.1@4339.26,3573.83 C170.1@4343.63,3573.83 ; C170.1@4339.26,3573.83 C170.1@4343.63,3573.83 ; C170.1@4339.26,3573.83 C170.1@4343.63,3573.83 ; C170.1@4339.26,3573.83 C170.1@4343.63,3573.83 ; C170.1@4343.63,3573.83 C171.1@4404.81,3573.83 ; C170.1@4343.63,3573.83 C171.1@4404.81,3573.83 ; C170.1@4343.63,3573.83 C171.1@4404.81,3573.83 ; C170.1@4343.63,3573.83 C171.1@4404.81,3573.83 ; C170.1@4343.63,3573.83 C171.1@4404.81,3573.83
+5V: C2.P C3.P C5.1 C15.1 C22.P C23.P C34.1 C42.1 C44.1 C248.1 D3.2 D5.1 D6.1 DISP1.2 F3.2 Q1.7 Q1.8 R1.1 R5.2 R6.2 R22.2 R24.2 R29.2 TP4.1 U1.1 U3.1 U4.12 U4.15 U4.16 U5.8 U5.10 U5.14 U7.8 U9.6 U10.5 U23.12 U23.15 U23.16 W4.2 | length 8307.6
  Top w5.91: U23.12@4841.56,908.74 4761.26,908.74 4748,922 4748,963 4770.54,985.54 U23.15@4841.56,985.54 4907.54,985.54 4916,994 v1(4916,1003) 4907.86,1011.14 U23.16@4841.56,1011.14
  Top w7: U4.12@735.74,2226.44 735.74,2279.25 753.21,2296.72 796.52,2296.72 812.54,2280.7 U4.15@812.54,2226.44 812.54,2166.53 v1@826.05,2153.02 ; v1(826.05,2149.08) v1@826.05,2153.02 ; U4.16@838.14,2226.44 838.14,2165.11 v1@826.05,2153.02
  Top w10: U5.10@1293.85,4648.82 1293.85,4603.54 ; v1(1294.83,4552.36) 1293.85,4553.35 1293.85,4603.54 ; U5.8@1345.03,4648.82 1345.03,4614.37 1334.2,4603.54 1293.85,4603.54 ; v1(1370.62,4379.13) U5.14@1370.62,4432.28 ; Q1.7@1737.15,4333.86 1737.15,4293.11 v1(1761.37,4268.9) 1787.15,4294.68 Q1.8@1787.15,4333.86
  Top w12.01: v1(2090.11,4166.54) 2125.54,4166.54 U7.8@2129.48,4162.6
  Top w15: U9.6@2155.07,4445.08 v1(2155.07,4493.31) C42.1@2155.07,4536.61 ; U10.5@2326.33,4455.51 v1(2326.33,4497.24) C44.1@2326.33,4536.61
  Top w20: v1(727.9,4075.98) C2.P@794.83,4075.98 ; v1(735.78,3930.31) U3.1@794.83,3930.32 v1(794.83,3969.68) ; v1(737.73,2723.56) C5.1@737.74,2765.97 ; v1(794.83,4016.93) C2.P@794.83,4075.98 ; v1(794.83,4135.04) C2.P@794.83,4075.98 ; v1(991.68,4194.09) C3.P@991.68,4253.15 ; v1(991.68,4312.2) C3.P@991.68,4253.15 ; v1(991.68,4367.32) U1.1@991.68,4406.69 v1(1050.74,4406.69) ; v1(1058.61,4253.15) C3.P@991.68,4253.15 ; v1(1176.72,4162.6) R1.1@1176.72,4201.97 ; v1(1180.07,3486.34) 1365.11,3486.34 D3.2@1365.11,3565.08 ; v1(1180.07,3565.08) D3.2@1365.11,3565.08 ; v1(1180.07,3643.82) D3.2@1365.11,3643.82 ; v1(1180.07,3722.56) D3.2@1286.37,3722.56 ; v1(1180.07,3801.3) D3.2@1247,3801.3 ; v1(1247,3872.17) D3.2@1247,3801.3 ; v1(1306.05,3872.17) D3.2@1306.05,3801.3 ; v1(1365.11,3872.17) D3.2@1365.11,3801.3 ; C15.1@1395.22,4186.22 v1(1395.22,4233.46) R6.2@1395.22,4279.83 ; v1(1424.16,3872.17) D3.2@1424.16,3801.3 ; F3.2@1431.03,3197.48 F3.2@1431.99,3197.48 ; v1(1468.06,3985.43) C23.P@1534.99,3985.43 ; v1(1468.06,4146.85) C22.P@1534.99,4146.85 ; v1(1479.28,3872.17) 1479.28,3801.3 D3.2@1424.16,3801.3 ; R5.2@1510.92,123 1511,123 R5.2@1512,122 1608,122 1663,177 1768.34,177 DISP1.2@1832.01,113.33 ; v1(1530.42,3197.48) F3.2@1431.99,3197.48 ; v1(1534.99,3926.38) C23.P@1534.99,3985.43 ; v1(1534.99,4044.49) C23.P@1534.99,3985.43 ; v1(1534.99,4087.8) C22.P@1534.99,4146.85 ; v1(1534.99,4205.91) C22.P@1534.99,4146.85 ; C34.1@2050.74,4166.53 v1(2090.11,4166.54) ; v1(2070.42,4268.9) R22.2@2099.07,4268.9 ; v1(2180.66,3725.59) D5.1@2180.66,3682.28 v1(2223.97,3682.28) ; R24.2@2285.87,4268.9 v1(2318.45,4268.9) ; v1(2440.5,3792.52) D6.1@2440.5,3839.76 v1(2487.74,3839.76) ; R29.2@2463.04,4268.9 v1(2495.62,4268.9) ; D3.2@1247,3801.3 1247,3761.93 D3.2@1286.37,3722.56 ; D3.2@1247,3801.3 D3.2@1306.05,3801.3 ; D3.2@1286.37,3722.56 D3.2@1365.11,3722.56 ; D3.2@1306.05,3801.3 D3.2@1365.11,3742.25 ; D3.2@1306.05,3801.3 D3.2@1365.11,3801.3 ; D3.2@1365.11,3565.08 D3.2@1365.11,3643.82 ; D3.2@1365.11,3643.82 D3.2@1365.11,3722.56 ; D3.2@1365.11,3643.82 D3.2@1365.11,3742.24 ; D3.2@1365.11,3722.56 D3.2@1365.11,3742.25 ; D3.2@1365.11,3742.24 D3.2@1424.16,3801.3 ; D3.2@1365.11,3742.25 D3.2@1365.11,3801.3 ; D3.2@1365.11,3742.24 D3.2@1365.11,3801.3 ; D3.2@1365.11,3801.3 D3.2@1424.16,3801.3 ; D3.2@1365.11,3801.3 D3.2@1424.16,3801.3 ; D3.2@1365.11,3801.3 D3.2@1424.16,3801.3 ; D3.2@1365.11,3801.3 D3.2@1424.16,3801.3 ; D3.2@1365.11,3801.3 D3.2@1424.16,3801.3 ; v1(1431.99,3106.93) F3.2@1431.99,3197.48 ; v1(1431.99,3106.93) F3.2@1431.99,3197.48 ; v1(1431.99,3106.93) F3.2@1431.99,3197.48 ; v1(1431.99,3106.93) F3.2@1431.99,3197.48 ; v1(1431.99,3106.93) F3.2@1431.99,3197.48
  Top w50: D3.2@1340.52,3668.41 D3.2@1365.11,3643.82 ; D3.2@1365.11,3619.56 1431.03,3553.65 F3.2@1431.03,3197.48
  Bottom w5.91: C248.1@4739.71,997.24 4910.24,997.24 v1(4916,1003)
  Bottom w20: W4.2@443,525 767,201 1744.34,201 DISP1.2@1832.01,113.33
+VIN: C7.1 C8.P F3.1 J11.5 | length 2336.3
  Top w50: J11.5@177.15,4228.7 546.01,4228.7 670.89,4103.82 670.89,3239.25 731.25,3178.9 C8.P@841.49,3178.9 ; C8.P@831.45,3168.86 C8.P@841.49,3178.9 ; C7.1@995.03,3178.9 1180.03,3178.9 1185.02,3178.9 C8.P@841.49,3178.9 ; F3.1@1180.03,3197.48 F3.1@1195.77,3181.73 ; F3.1@1202.22,3226.08 F3.1@1195.77,3219.63 ; F3.1@1195.77,3181.73 F3.1@1195.77,3197.48 ; F3.1@1195.77,3181.73 F3.1@1195.77,3197.48 ; F3.1@1195.77,3181.73 F3.1@1195.77,3197.48 ; F3.1@1195.77,3181.73 F3.1@1195.77,3197.48 ; F3.1@1195.77,3197.48 F3.1@1195.77,3219.63 ; F3.1@1195.77,3197.48 F3.1@1195.77,3219.63 ; F3.1@1195.77,3197.48 F3.1@1195.77,3219.63 ; F3.1@1195.77,3197.48 F3.1@1195.77,3219.63
AA0: J3.1 U11.C5 | length 2640.1
  Top w5.91: U11.C5@3283.02,1776.77 3302.71,1757.08 3302.71,1607.29 3421,1489 3480,1489 3566,1403 3566,1067 3923,710 4238,710 4416,532 J3.1@5123,532
AA1: J3.2 U11.C20 | length 3458.6
  Top w5.91: v1(2672.78,1757.08) U11.C20@2692.47,1776.77
  Signal 3 w5.91: v1(2672.78,1757.08) 2692.47,1776.77 3402.23,1776.77 3497,1682 3497,1502 3623,1376 3623,970 3839,754 4176,754 4440,490 5159.74,490 J3.2@5201.74,532
AA2: J3.3 U11.C22 | length 3425.1
  Top w5.91: v1(2594.04,1796.46) U11.C22@2613.73,1776.77
  Signal 3 w5.91: v1(2594.04,1796.46) 2613.73,1816.14 3428.86,1816.14 3552,1693 3552,1477 3643,1386 3643,986 3853,776 4187,776 4352.26,610.74 J3.3@5123,610.74
AA3: J3.4 U11.D21 | length 3442.6
  Top w5.91: U11.D21@2653.1,1816.14 v1(2672.79,1835.83)
  Signal 3 w5.91: v1(2672.79,1835.83) 2692.47,1855.51 3418.49,1855.51 3566,1708 3566,1481 3656,1391 3656,1000 3860,796 4198,796 4345.46,648.54 5163.94,648.54 J3.4@5201.74,610.74
AB0: J5.1 U11.W9 | length 2540.8
  Top w5.91: U11.W9@3125.54,2406.69 v1(3145.23,2387.01)
  Signal 7 w5.91: v1(3145.23,2387.01) 3165,2406.78 3165,2446 3204,2485 3204,2903 3246.04,2945.04 4088.04,2945.04 4151,3008 4151,3009 4581,3439 J5.1@4954,3439
AB1: J5.2 U11.AD11 | length 2417.6
  Top w5.91: v1(3027.11,2623.23) U11.AD11@3046.8,2603.54
  Signal 9 w5.91: v1(3027.11,2623.23) 3047,2643.12 3047,2722 3091,2766 3747,2766 3789,2808 4196,2808 4707,3319 4912.74,3319 J5.2@5032.74,3439
AB2: J5.3 U11.AB7 | length 2487.4
  Top w5.91: v1(3184.59,2505.12) U11.AB7@3204.28,2524.8
  Signal 6 w5.91: v1(3184.59,2505.12) 3164,2525.71 3164,2896 3411,3143 3673,3143 4063,3533 4938.74,3533 J5.3@4954,3517.74
AB3: J5.4 U11.AE6 | length 2397.7
  Top w5.91: U11.AE6@3243.65,2642.91 v1(3263.34,2623.23)
  Signal 6 w5.91: v1(3263.34,2623.23) 3243,2643.56 3243,2920 3450,3127 3693,3127 4075,3509 4862,3509 4895,3476 4991,3476 J5.4@5032.74,3517.74
ADC_CLK: J2.10 U11.P23 | length 2868.1
  Top w5.91: v1(2554.67,2229.53) U11.P23@2574.36,2209.84
  Signal 4 w5.91: J2.10@154.38,1711.38 J2.10@144.36,1711.38 101.31,1754.42 101.31,1958 131.85,1988.54 260.89,1988.54 331.35,2059 2167,2059 2317.84,2209.84 2534.99,2209.84 v1(2554.67,2229.53)
ADC_DIN: J2.12 U11.L18 | length 2833.6
  Top w5.91: v1(2751.52,2111.42) U11.L18@2771.21,2091.73
  Signal 7 w5.91: J2.12@144.36,1632.64 183.72,1672 249,1672 584,2007 2293.39,2007 2341.66,2055.27 2341.66,2055.66 2377.73,2091.73 2731.84,2091.73 v1(2751.52,2111.42)
ADC_DOUT: J2.13 U11.K19 | length 2771
  Top w5.91: U11.K19@2731.84,2052.36 v1(2751.53,2072.05)
  Signal 7 w5.91: J2.13@223.1,1553.9 223.1,1554.1 655,1986 2298,1986 2364.36,2052.36 2731.84,2052.36 v1(2751.53,2072.05)
CLK_125MHZ: R35.1 U11.A14 | length 326.9
  Top w5.91: U11.A14@2928.69,1698.03 2909,1678.34 2909,1507 2956.25,1459.75 R35.1@2956.25,1398.82
CLOSED_OUT: J6.5 U11.AD25 | length 2739
  Top w5.91: v1(2475.93,2623.23) U11.AD25@2495.62,2603.54
  Signal 6 w5.91: J6.5@223.1,3729.6 362.4,3729.6 1449.09,2642.91 2456.25,2642.91 v1(2475.93,2623.23)
CONFIG_SPI_MISO: R30.2 U11.AF24 U12.8 | length 1916.2
  Top w5.91: v1(2515.3,2701.97) U11.AF24@2534.99,2682.28 ; v1(2531.28,3242.46) 2695.32,3406.5 U12.8@2761.37,3406.5
  Bottom w5.91: R30.2@1991,2742 1887,2742 1867,2762 1867,2875 1893,2901 2267,2901 2382,2786 2382,2718 2418,2682 2495.33,2682 v1(2515.3,2701.97) 2515.3,3226.48 v1(2531.28,3242.46)
CONFIG_SPI_MOSI: U11.AB15 U12.1 | length 1080
  Top w5.91: v1(2849,3391) 2864.5,3406.5 U12.1@3033.02,3406.5 ; v1(2869.63,2544.49) U11.AB15@2889.32,2524.8
  Signal 4 w5.91: v1(2849,3391) 2858,3382 2858,2725.18 2849.95,2717.12 2849.95,2564.17 v1(2869.63,2544.49)
CONFIG_SPI_SCK: C52.1 R32.1 R163.2 U12.2 | length 1007
  Top w5.91: R32.1@2538.93,3402.76 2570.42,3402.76 2590.11,3422.44 2684.59,3422.44 2692.47,3430.31 2889.32,3430.31 2915.5,3456.5 U12.2@3033.02,3456.5 U12.2@3033.02,3457.87 ; C52.1@3157.04,3457.87 v1(3113.73,3457.87) ; U12.2@3033.02,3457.87 v1(3113.73,3457.87) ; U12.2@3033.02,3457.87 v1(3113.73,3457.87) ; U12.2@3033.02,3457.87 v1(3113.73,3457.87) ; U12.2@3033.02,3457.87 v1(3113.73,3457.87) ; U12.2@3033.02,3457.87 v1(3113.73,3457.87)
  Bottom w5.91: v1(3113.73,3457.87) R163.2@3156.15,3457.87
CONFIG_SPI_SEL: C51.1 R156.1 U11.AA7 U12.4 | length 1309.2
  Top w5.91: U12.4@3033.02,3556.5 v1(3112.5,3556.5) 3156.84,3556.5 C51.1@3157.04,3556.3 3157.73,3555.61 v1(3157.73,3522.03) ; U11.AA7@3204.28,2485.43 v1(3223.97,2505.12) ; U12.4@3068.3,3556.3 U12.4@3068.3,3556.5 ; U12.4@3068.3,3556.3 U12.4@3068.3,3556.5 ; U12.4@3068.3,3556.3 U12.4@3068.3,3556.5 ; U12.4@3068.3,3556.3 U12.4@3068.3,3556.5 ; U12.4@3068.3,3556.3 U12.4@3068.3,3556.5 ; C51.1@3151.5,3556.3 C51.1@3154.27,3553.53 ; C51.1@3151.5,3556.3 C51.1@3154.27,3553.53 ; C51.1@3151.5,3556.3 C51.1@3154.27,3553.53 ; C51.1@3151.5,3556.3 C51.1@3154.27,3553.53 ; C51.1@3151.5,3556.3 C51.1@3154.27,3553.53 ; C51.1@3154.27,3553.53 C51.1@3157.04,3550.76 ; C51.1@3154.27,3553.53 C51.1@3157.04,3550.76 ; C51.1@3154.27,3553.53 C51.1@3157.04,3550.76 ; C51.1@3154.27,3553.53 C51.1@3157.04,3550.76 ; C51.1@3154.27,3553.53 C51.1@3157.04,3550.76
  Signal 4 w5.91: v1(3157.73,3522.03) 3157.73,3230.27 3204.28,3183.72 3204.28,2524.8 v1(3223.97,2505.12)
  Bottom w5.91: R156.1@3074.36,3556.3 3112.31,3556.3 v1(3112.5,3556.5)
DDR2_VREF: C17.1 C55.1 C56.1 C60.1 C63.1 C180.1 C182.1 C185.1 C187.1 C242.1 C245.1 U5.7 U11.AA5 U11.AE2 U11.C1 U11.H4 U11.J2 U11.M1 U11.R1 U11.R10 U11.W2 U21.J2 U22.J2 | length 11306.1
  Top w10: U5.7@1370.62,4648.82 v1(1370.62,4700) ; C17.1@1538.93,4335.83 v1(1538.93,4367.32) ; U22.J2@4515.3,1276.77 4542.86,1249.21 v1(4542.86,1182.28) ; U21.J2@4515.3,2560.24 4542.86,2532.68 v1(4542.86,2465.75)
  Top w12: U11.R10@3086.17,2249.21 v1(3105.86,2229.53) ; U11.AA5@3283.02,2485.43 v1(3302.71,2465.75) ; U11.H4@3322.39,1973.62 v1(3342.08,1953.93) ; U11.J2@3401.13,2012.99 v1(3420.82,1993.3) ; U11.W2@3401.13,2406.69 v1(3420.82,2426.38) ; U11.AE2@3401.13,2642.91 v1(3420.82,2662.6) ; U11.C1@3440.5,1776.77 v1(3460.19,1757.08)
  Top w20: U11.R1@3440.5,2249.21 3512.83,2176.88 3512.83,2117 ; U11.M1@3442.48,2131.1 U11.M1@3440.5,2131.1 3454.6,2117 3512.83,2117 ; v1(3512.83,2060.75) 3512.83,2117 ; v1(3519.24,1788.58) C56.1@3550.74,1788.58 ; v1(3519.24,1989.37) C55.1@3550.74,1989.37 ; v1(3523.18,2379.13) C63.1@3554.67,2379.13 ; v1(3523.18,2698.03) C60.1@3554.67,2698.03
  Signal 3 w25: v1(1538.93,4367.32) 1544.25,4362 v1(2975,4362)
  Signal 10 w20: v1(3105.86,2229.53) 3132,2203.38 3132,2178.62 3112,2158.62 3112,2141.63 3131.56,2122.07 3131.56,2047.44 3186,1993 3262,1993 3301.07,1953.93 v1(3342.08,1953.93) 3342.08,1982.08 3353.3,1993.3 v1(3420.82,1993.3) 3515.31,1993.3 v1(3519.24,1989.37) ; v1(3302.71,2465.75) 3384.46,2465.75 3410.17,2491.46 3421.81,2491.46 3464.6,2534.25 ; v1(3420.82,2426.38) 3455.19,2392 3510.31,2392 v1(3523.18,2379.13) 3523.18,2475.67 3464.6,2534.25 ; v1(3420.82,2662.6) 3464.6,2662.6 ; v1(3460.19,1757.08) 3491.68,1788.58 v1(3519.24,1788.58) 3558.61,1788.58 ; v1(3512.83,2060.75) 3519.24,2054.35 v1(3519.24,1989.37) ; v1(4542.86,1182.28) 4511.37,1150.79 4117.67,1150.79 ; v1(4542.86,2465.75) 4483.81,2406.69 4117.67,2406.69 ; 3464.6,2534.25 3464.6,2662.6 ; 3464.6,2662.6 3500.03,2698.03 v1(3523.18,2698.03) 3586.17,2698.03 3794.83,2906.69 3794.83,2910.63 4034.99,2910.63 4117.67,2827.95 4117.67,2406.69 ; v1(3519.24,1989.37) 3558.61,1950 3558.61,1788.58 ; 3558.61,1788.58 3558.61,1682.28 3712.15,1528.74 3712.15,1225.59 3822.39,1115.35 4082.23,1115.35 4117.67,1150.79 ; 4117.67,1150.79 4117.67,2406.69
  Signal 10 w25: v1(1370.62,4700) 1370.62,4665.55 1412.94,4623.23 1483.81,4623.23 1538.93,4568.11 v1(1538.93,4367.32) ; v1(2975,4362) 3080,4257 3640,4257 3794.83,4102.17 3794.83,2910.63
  Bottom w20: v1(3519.24,1788.58) C182.1@3550.74,1788.58 ; v1(3519.24,1989.37) C180.1@3550.74,1989.37 ; v1(3523.18,2379.13) C187.1@3554.67,2379.13 ; v1(3523.18,2698.03) C185.1@3554.67,2698.03 ; v1(4542.86,1182.28) C245.1@4582.23,1182.28 ; v1(4542.86,2465.75) C242.1@4582.23,2465.75
DDR_A0: R269.2 U11.M8 | length 1371.4
  Top w5.91: U11.M8@3164.91,2131.1 v1(3184.6,2111.42)
  Signal 6 w4.02: v1(3184.6,2111.42) 3166,2092.82 3166,2051 3243,1974 3505.25,1974 3545,1934.25 4058.61,1934.25 4137.35,1855.51 4137.35,1790.01 v1(4154.13,1773.23)
  Bottom w4.02: v1(4154.13,1773.23) 4154.13,1758.43 4222.4,1690.16 R269.2@4244.96,1690.16
DDR_A1: R103.2 U11.M3 | length 1046
  Top w4.02: U11.M3@3361.76,2131.1 v1(3381.45,2111.42) ; v1(4189.32,2237.24) 4189.32,2265.75 4216.09,2292.52 R103.2@4244.95,2292.52
  Bottom w4.02: v1(3381.45,2111.42) 3399.16,2093.7 3567.71,2093.7 3583.3,2078.1 3590.42,2078.1 3591.25,2078.93 4091.34,2078.93 4178.77,2166.36 4178.77,2226.69 v1(4189.32,2237.24)
DDR_A2: R263.2 U11.M4 | length 993.6
  Top w4.02: U11.M4@3322.39,2131.1 v1(3342.08,2111.42)
  Signal 6 w4.02: v1(3342.08,2111.42) 3361.76,2131.1 3475.34,2131.1 3514.42,2131.1 3521.91,2123.61 3521.91,2123.32 3587.91,2057.32 4158.06,2057.32 v1(4216.09,2115.35)
  Bottom w4.02: v1(4216.09,2115.35) R263.2@4244.95,2115.35
DDR_A3: R264.2 U11.M6 | length 1049.3
  Top w4.02: U11.M6@3243.65,2131.1 v1(3263.34,2111.42)
  Bottom w4.02: v1(3263.34,2111.42) 3281.75,2093 3363.88,2093 3405.72,2051.16 3447.72,2051.16 3469.08,2029.8 4169.91,2029.8 4184.59,2044.49 R264.2@4244.95,2044.49
DDR_A4: R262.2 U11.M5 | length 1051.7
  Top w4.02: U11.M5@3283.02,2131.1 v1(3302.71,2111.42)
  Signal 7 w4.02: v1(3302.71,2111.42) 3323.04,2131.75 3480.63,2131.75 3540.31,2072.07 v1(3540.31,2070.85)
  Bottom w4.02: v1@3542.28,2069.01 3543.11,2068.18 4094.62,2068.18 4095.45,2069.01 4212.66,2186.22 R262.2@4244.95,2186.22
DDR_A5: R104.2 U11.N4 | length 1042.5
  Top w4.02: U11.N4@3322.39,2170.47 v1(3342.08,2150.79) ; v1(4216.09,2221.65) R104.2@4244.96,2221.65
  Signal 6 w4.02: v1(3342.08,2150.79) 3361.76,2170.47 3489.08,2170.47 3532.66,2126.89 3532.66,2126.6 3588.1,2071.17 4065.61,2071.17 v1(4216.09,2221.65)
DDR_A6: R105.2 U11.N5 | length 1047.5
  Top w4.02: U11.N5@3283.02,2170.47 v1(3302.71,2150.79) ; v1(4203.14,2067.52) 4211.88,2067.52 4222.9,2078.54 4243.58,2078.54 R105.2@4244.96,2079.92 R105.2@4244.51,2079.49
  Signal 4 w4.02: v1(3302.71,2150.79) 3322.39,2170.47 3489.91,2170.47 3530.56,2129.82 3530.56,2114.68 3546.75,2098.49 3562.53,2098.49 3608.02,2053 4188.62,2053 v1(4203.14,2067.52)
DDR_A7: R107.2 U11.N2 | length 910.7
  Top w4.02: U11.N2@3401.13,2170.47 v1(3420.82,2150.79) ; v1(4216.09,2009.06) R107.2@4244.95,2009.06
  Signal 4 w4.02: v1(3420.82,2150.79) 3483.04,2088.56 3558.43,2088.56 3617.99,2029 4196,2029 4215.94,2009.06 v1(4216.09,2009.06)
DDR_A8: R109.2 U11.N1 | length 900.8
  Top w4.02: U11.N1@3440.5,2170.47 v1(3460.19,2150.79) ; v1(4216.09,1938.19) R109.2@4244.95,1938.19
  Signal 4 w4.02: v1(3715.61,1986.89) 3715.72,1987 4072.79,1987 4121.6,1938.19 v1(4216.09,1938.19)
  Signal 7 w4.02: v1(3460.19,2150.79) 3501.21,2150.79 3562,2090 3612.5,2090 v1(3715.61,1986.89)
DDR_A9: R261.2 U11.N7 | length 1189.8
  Top w4.02: U11.N7@3204.28,2170.47 v1(3223.97,2150.79)
  Bottom w4.02: v1(3223.97,2150.79) 3243.75,2131 3474.16,2131 3496.75,2108.41 3567.59,2108.41 3571.15,2104.85 3587.15,2088.85 4087.23,2088.85 4158.18,2159.8 4158.18,2237.71 4177.55,2257.09 R261.2@4244.95,2257.09
DDR_A10: R260.2 U11.N6 | length 1196.2
  Top w4.02: U11.N6@3243.65,2170.47 v1(3263.34,2150.79)
  Bottom w4.02: v1(3263.34,2150.79) 3281.55,2169 3456,2169 3465,2178 3589.58,2178 3667.98,2099.61 4062.55,2099.61 4145.22,2182.28 4145.22,2264.96 4208.22,2327.95 R260.2@4244.95,2327.95
DDR_A11: R106.2 U11.P2 | length 951.4
  Top w4.02: U11.P2@3401.13,2209.84 v1(3420.82,2190.16) ; v1(4216.09,2150.79) R106.2@4244.95,2150.79
  Signal 4 w4.02: v1(3420.82,2190.16) 3486.9,2190.16 3540.49,2136.56 3540.49,2133.47 ; 3540.48,2133.46 3540.48,2118.79 3550.86,2108.41 3565.54,2108.41 ; 3565.55,2108.42 3566.63,2108.42 3612.05,2063 4128.3,2063 v1(4216.09,2150.79)
DDR_A12: R102.2 U11.P1 | length 1112.9
  Top w4.02: v1(3421.31,2228.69) U11.P1@3441,2209 ; v1(4216.09,2363.39) R102.2@4244.95,2363.39
  Signal 4 w4.02: v1(3421.31,2228.69) 3449.92,2200.08 3493.92,2200.08 3520.58,2173.42 3566.23,2173.42 3664.65,2075 4057.62,2075 4129.48,2146.85 4129.48,2276.77 v1(4216.09,2363.39) ; v1@3421.31,2229.53 v1@3422.84,2228